# Altium PCB PowerUnit.PcbDoc
Units mil, origin at the board's own origin, x right, y up, seen from the top; angles counter-clockwise.
Board outline 3248.03 x 3149.61 mil, 2 copper layers (Top Layer, Bottom Layer); 31 components, 12 nets, 92 pads, 3 vias.
Unrouted connection lines stored in the file: 1.
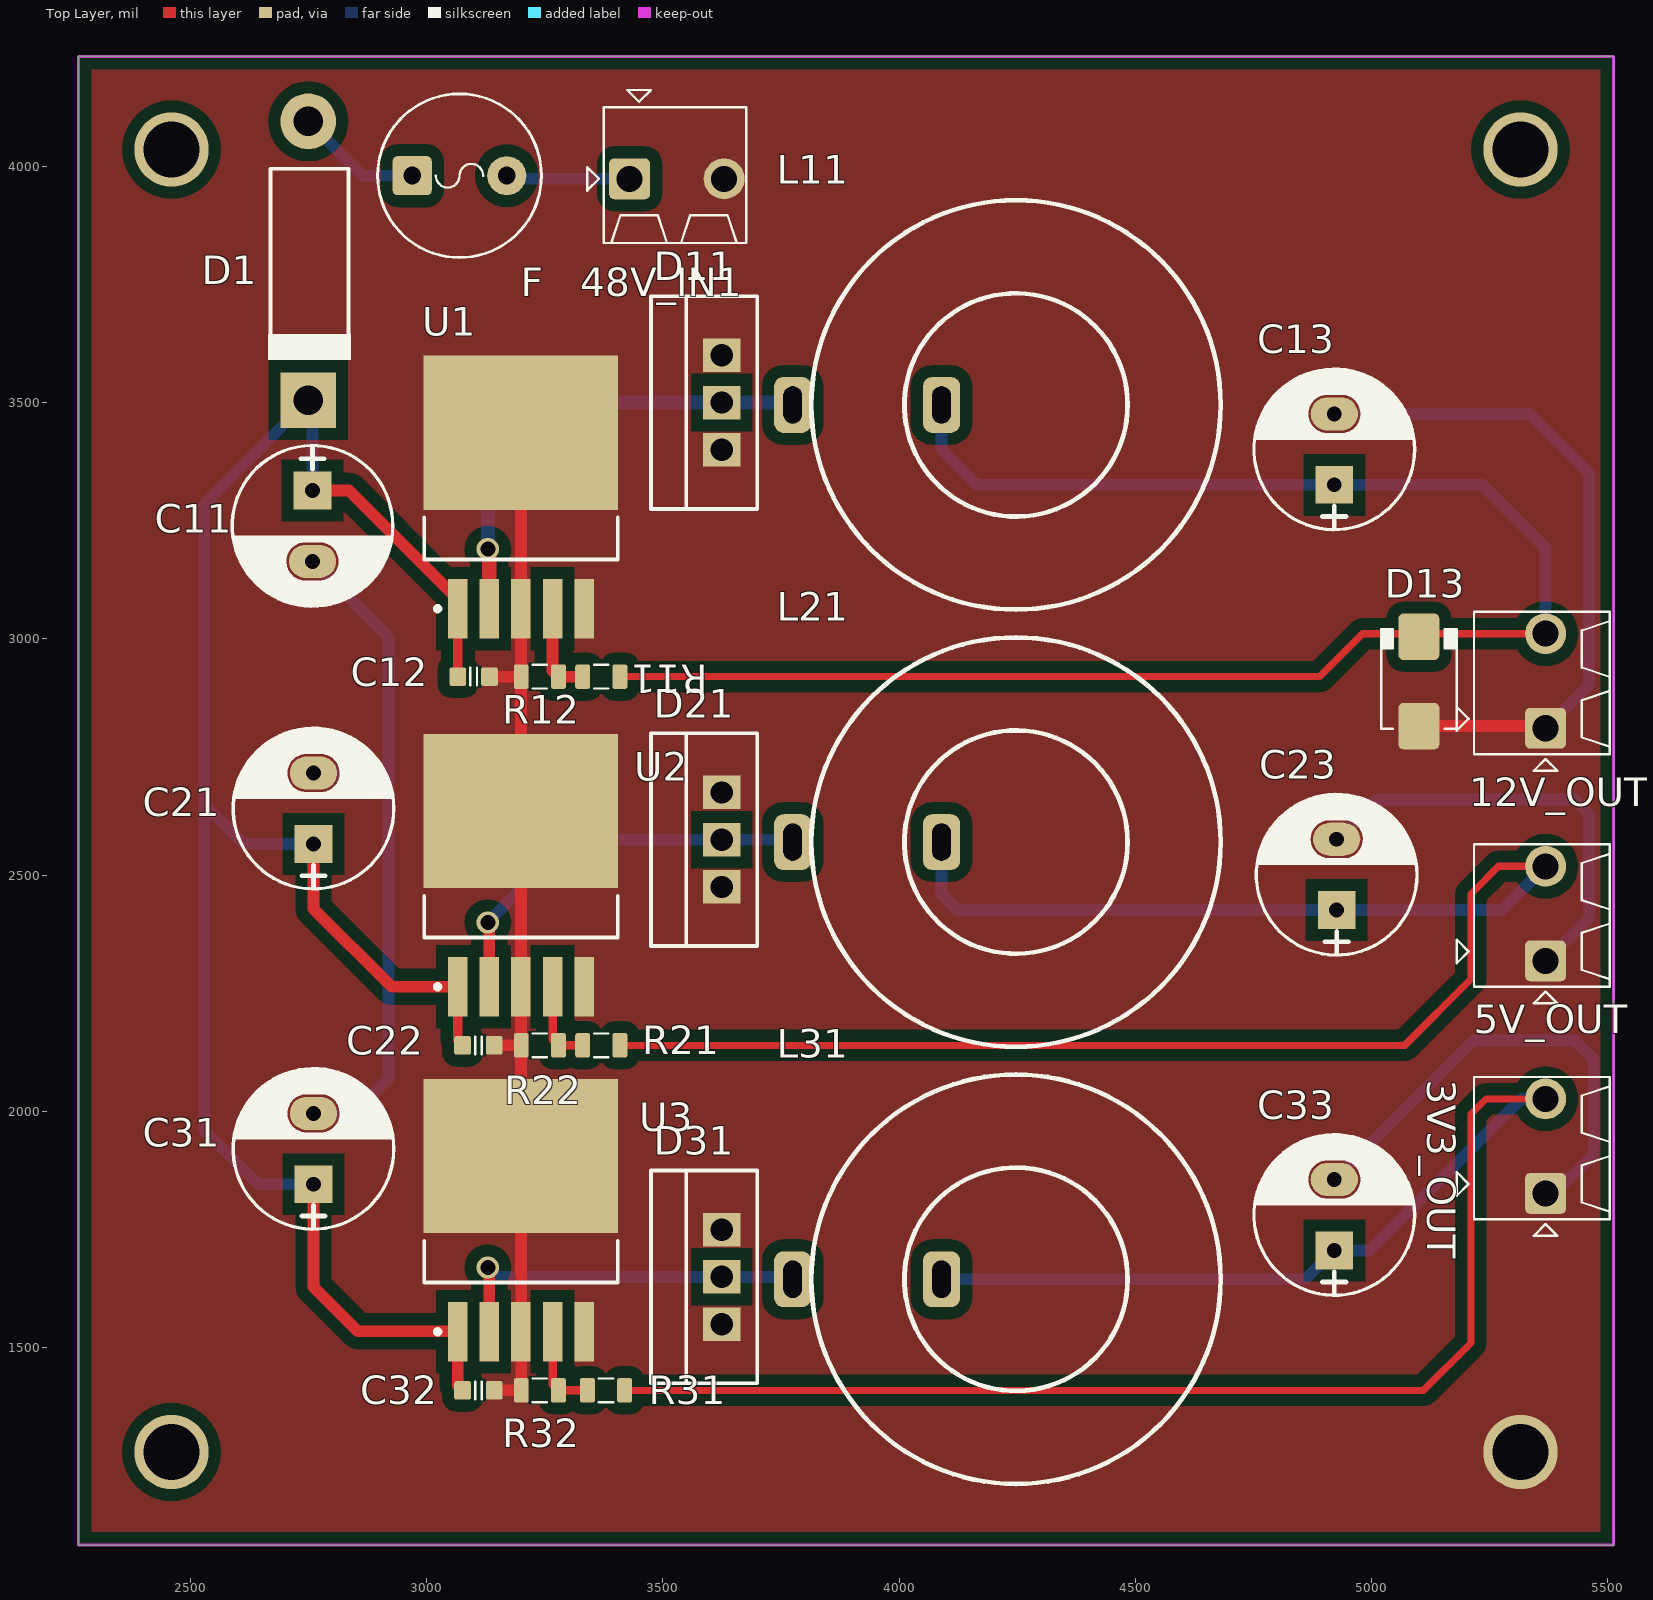
[diagram p0: Top Layer view]
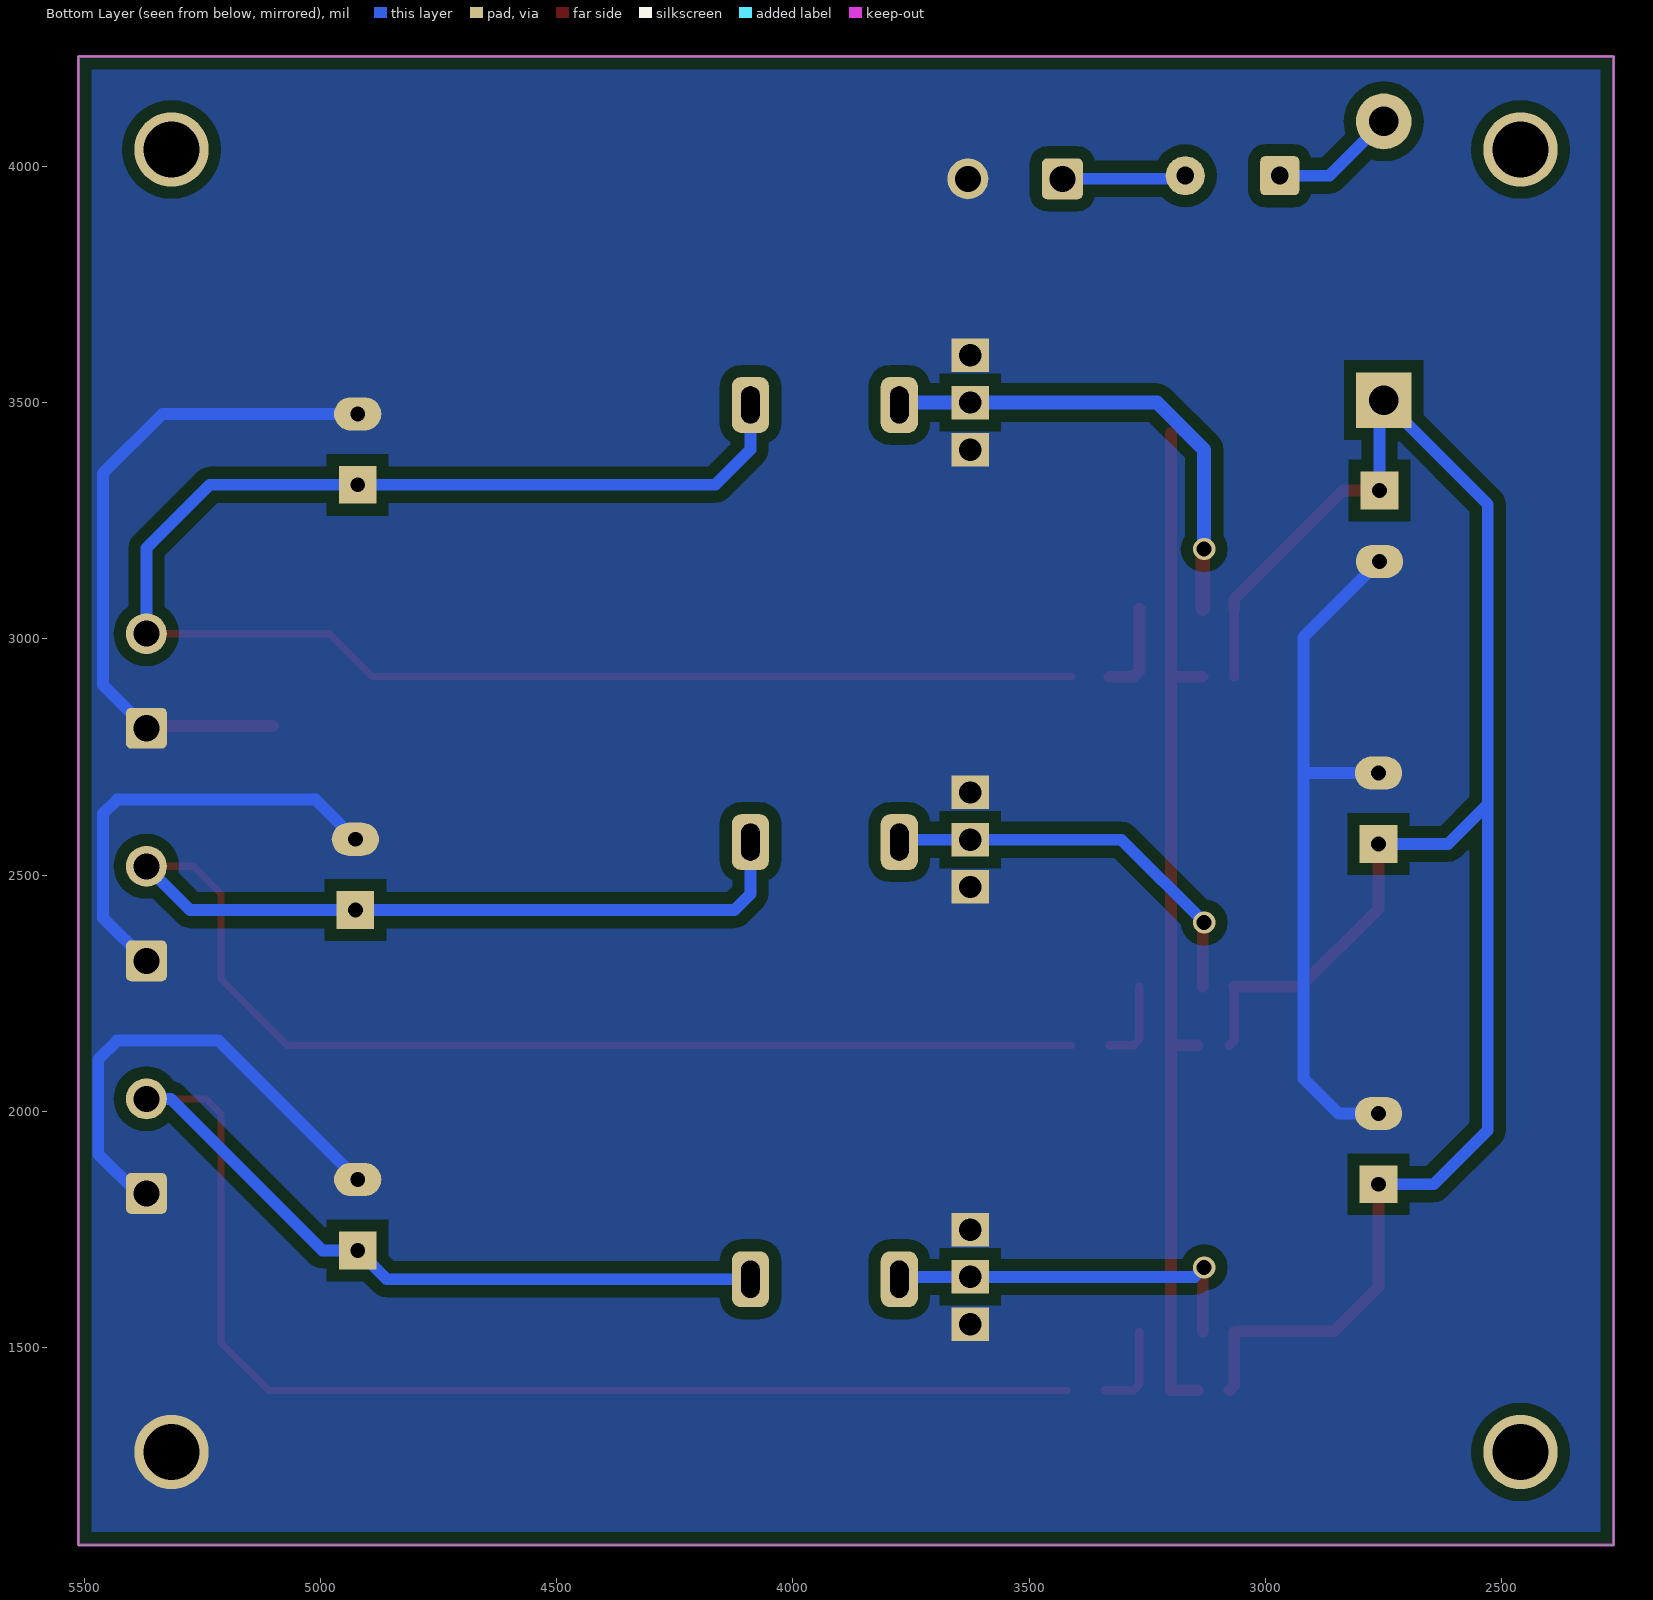
[diagram p1: Bottom Layer view, seen from below]
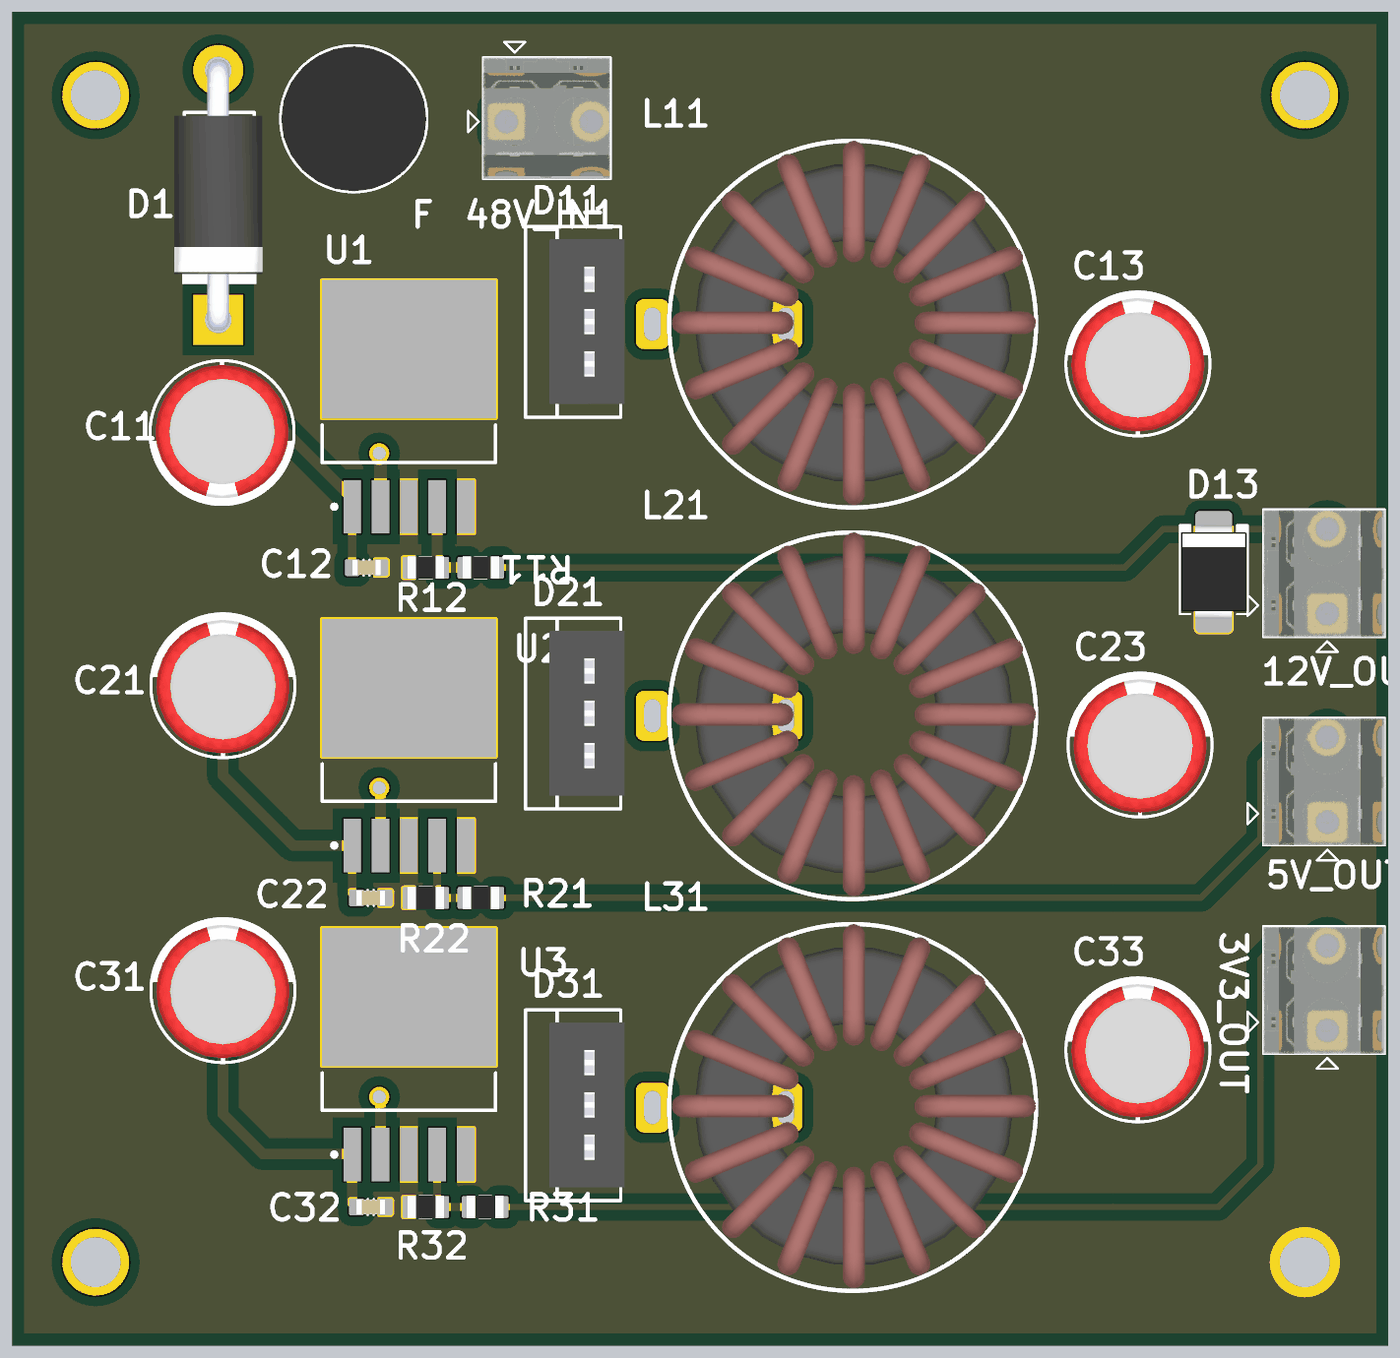
[diagram p2: 3D render of the assembled board from above, using the file's embedded part models]

## Layer stack, top to bottom
Top Solder: solder mask 0.4, Solder Resist, Dk 3.5
Top Layer: signal copper 1.4
Dielectric 1: dielectric 12.6, FR-4, Dk 4.8
Bottom Layer: signal copper 1.4
Bottom Solder: solder mask 0.4, Solder Resist, Dk 3.5

## Board outline
2263.78,1082.68 5511.81,1082.68 5511.81,4232.28 2263.78,4232.28

## Design rules (kind name [scope] priority, off if disabled: settings)
Clearance [All] p1: gap=25
PlaneConnect [All] p1: planeconnectstyle=Direct reliefexpansion=20 reliefentries=4 reliefconductorwidth=10 reliefairgap=10
PolygonConnect [All] p1: connectstyle=Direct reliefconductorwidth=10 reliefentries=4 polygonreliefangle="90 Angle" airgapwidth=10
RoutingVias [All] p1: holewidth=28 width=50 viastyle="Through Hole" minholewidth=19.68 minwidth=43.31 maxholewidth=196.85 maxwidth=196.85
SolderMaskExpansion [All] p1: expansion=4
Width [All] p1: maxlimit=78.74 minlimit=10 preferedwidth=10
29 further rules are at their usual default settings.

## Components (designator, comment, footprint, x,y, rotation, side; value= is the part's Value field where it differs from the comment)
3V3_OUT "Stackable ScrewTerm" 2P_PCB_ScrewTerm_200mil 5216.54,1771.65 r0 top
5V_OUT "Stackable ScrewTerm" 2P_PCB_ScrewTerm_200mil 5216.54,2263.78 r0 top
12V_OUT "Stackable ScrewTerm" 2P_PCB_ScrewTerm_200mil 5216.54,2755.91 r0 top
48V_IN1 "Stackable ScrewTerm" 2P_PCB_ScrewTerm_200mil 3375,4125 r270 top
C11 "Cap" "CAP 3.8mm" 2760,3240 r270 top
C12 "CAP NP" CAPC1608N 3100,2920 r180 top
C13 "Cap" "CAP 3.8mm" 4920,3400 r90 top
C21 "Cap" "CAP 3.8mm" 2760,2640 r90 top
C22 "CAP NP" CAPC1608N 3110,2140 r180 top
C23 "Cap" "CAP 3.8mm" 4925,2500 r90 top
C31 "Cap" "CAP 3.8mm" 2760,1920 r90 top
C32 "CAP NP" CAPC1608N 3110,1410 r180 top
C33 "Cap" "CAP 3.8mm" 4920,1780 r90 top
D1 "SS14" "Diode 3A" 2750,3800 r270 top
D11 "MOSPEC S20C40C" TO-220 3625,3500 r90 top
D13 "TVS12V" DO-214AA 5100,2910 r90 top
D21 "MOSPEC S20C40C" TO-220 3625,2575 r90 top
D31 "MOSPEC S20C40C" TO-220 3625,1650 r90 top
F "1.5A" FUSE_SR-5-BK 3070,3980 r0 top
L11 "Inductor" Toroid 3775,3500 r0 top
L21 "Inductor" Toroid 3775,2575 r0 top
L31 "Inductor" Toroid 3775,1650 r0 top
R11 "Res" RESC2012N 3370,2920 r0 top
R12 "Res" RESC2012N 3240,2920 r0 top
R21 "Res" RESC2012N 3370,2140 r0 top
R22 "Res" RESC2012N 3240,2140 r0 top
R31 "Res" RESC2012N 3380,1410 r0 top
R32 "Res" RESC2012N 3240,1410 r0 top
U1 "LM2596S-ADJ" TS5B_N 3200,3300 r90 top
U2 "LM2596S-ADJ" TS5B_N 3200,2500 r90 top
U3 "LM2596S-ADJ" TS5B_N 3200,1770 r90 top

## Footprints (in the part's own frame and the unit in brackets; to place one, negate y for a bottom-side part, rotate by r counter-clockwise, add the part's x,y. Pads: shape width x height; smd on the part's side, far side on the other; paste and mask are expansions set on the pad)
2P_PCB_ScrewTerm_200mil [mm]
  rrect25% 2.2x2.2 hole 1.4: 1(3.85,1.397)
  round 2.2 hole 1.4: 2(3.85,6.477)
  silkscreen extent -0.93,-0.89 7.3,7.66, body extent 0,0 7.3,7.62, height 8.5
"CAP 3.8mm" [mil] "16V 470uF"
  rect 80x80 hole 31.5: 1(-74,-1)
  oval 70x100 hole 31.5: 2(76,-1)
  silkscreen extent -169,-171 171,169, body extent -159,-158 156,156, height 446
CAPC1608N [mm] "Chip Capacitor, Body 1.6x0.8mm, 0603, IPC Medium Density"
  round 0.254 on Mech14: 0(0,0)
  rrect25% 0.9x1 smd: 1(-0.85,0) 2(0.85,0)
  Top Layer pour cut-out: -0.4,0.6 0.4,0.6 0.4,-0.6 -0.4,-0.6
  silkscreen extent -0.18,-0.48 0.18,0.48, body extent -0.85,-0.45 0.85,0.45, height 0.89
"Diode 3A" [mm] "Diode Schottky 1N5822"
  round 3 hole 1.6: A(-7.493,0)
  rect 3x3 hole 1.6: K(7.493,0)
  silkscreen extent -4.95,-2.16 5.33,2.29, body extent -8.15,-2.65 8.15,2.65, height 6.3
DO-214AA [mm] "JEDEC DO214 variation AA. SMB"
  round 0.508 on Mech14: 0(0,0)
  rrect25% 2.5x2.2 smd: A(-2.4,0) K(2.4,0)
  silkscreen extent -2.54,-2.03 2.79,2.03, body extent -2.8,-1.97 2.8,1.98, height 2.62
FUSE_SR-5-BK [mm]
  round 0.5 on Mech14: 0(0,0)
  rrect25% 2.1x2.1 hole 0.965: 1(-2.54,0)
  round 2.1 hole 0.965: 2(2.54,0)
  silkscreen extent -4.4,-4.4 4.4,4.4, body extent -4.35,-4.32 4.35,4.32, height 8.29
RESC2012N [mm] "Chip Resistor, Body 2.0x1.2mm, 0805, IPC Medium Density"
  round 0.254 on Mech14: 0(0,0)
  rrect25% 0.8x1.3 smd: 1(-1,0) 2(1,0)
  Top Layer pour cut-out: -0.6,0.75 0.6,0.75 0.6,-0.75 -0.6,-0.75
  silkscreen extent -0.38,-0.64 0.38,0.64, body extent -1.1,-0.67 1.1,0.68, height 0.69
TO-220 [mm]
  rect 1.8x2 hole 1.2: 1(-2.54,0) 2(0,0) 3(2.54,0)
  silkscreen extent -5.71,-1.91 5.71,3.81, body extent -4.92,-2.13 4.98,2.37, height 8.08
Toroid [mm]
  rrect50% 2x3 hole 1 slot 2 at 90 deg: 1(0,-0.127) 2(8,-0.127)
  silkscreen extent 1,-11.13 23,10.87, body extent 1.16,-10.97 23,10.87, height 11.43
TS5B_N [mm] "D2-PAK, 6-Leads, Body 8.6x10.2mm, Pitch 1.7mm, Lead Span 14.1mm, IPC Medium Density"
  rect 3.2x1.05 smd: 1(-6,3.4) 2(-6,1.7) 3(-6,0) 4(-6,-1.7) 5(-6,-3.4)
  rect 8.3x10.45 smd: 6(3.45,0)
  silkscreen extent -6.12,-5.2 -1.1,5.2, body extent -3.35,-5.2 6.05,5.2, height 4.65

## Part data
3V3_OUT 5V_OUT 12V_OUT 48V_IN1: library part 2P_ScrewTerm_90S_3.81MM, "Terminal Block Screw Type THT 2-Position 3.81mm pitch"
D1 D13: library part "Diode Schottky"
D11 D21 D31: library part "Diode x2"
F: library part Fuse
U1 U2 U3: "SIMPLE SWITCHER Power Converter 150 KHz 3A Step-Down Voltage Regulator"

## Free pads (board coordinates)
  round 157.48 hole 118.11: 0(2460.63,4035.43) 1(2460.63,1279.53) 2(5314.96,1279.53) 3(5314.96,4035.43)

## Via types
v1: diameter 47.24, hole 31.5, Top Layer to Bottom Layer, 3 vias

## Nets (pads, with @x,y where several pads share a name; then routed paths per layer and width w, separated by ;. In a path a pad name is that pad's centre, name@x,y a point inside that pad or via, vN(x,y) a via of type N, cw(c..) or ccw(c..) an arc to the next point about the centre after c; other vN are vias at no path point)
+5V: 5V_OUT.2 C23.1 L21.2 R21.2 | length 3661.7
  Top Layer w15: R21.2 5070,2140 5210,2280 5210,2460 5268.78,2518.78 5V_OUT.2
  Bottom Layer w25: L21.2 4089.96,2460.04 4124,2426 C23.1 5275.33,2426 5V_OUT.2
+12V: 3V3_OUT.2 12V_OUT.2 C13.1 C33.1 D13.K L11.2 L31.2 R11.2 R31.2 | length 7561.2
  Top Layer w15: R11.2 4890,2920 4980.91,3010.91 12V_OUT.2 ; R31.2 5110,1410 5210,1510 5210,1995 5241.65,2026.65 3V3_OUT.2
  Bottom Layer w25: L31.2 4860,1645 C33.1 4996,1706 5316.65,2026.65 3V3_OUT.2 ; L11.2 4089.96,3400.04 4164,3326 C13.1 5234,3326 5368.11,3191.89 12V_OUT.2
+48V: 48V_IN1.1 F.2 | length 262.7
  Bottom Layer w25: F.2 3176.57,3973.43 48V_IN1.1
FB1: R11.1 R12.2 U1.4 | length 200.2
  Top Layer w25: U1.4 3266.93,2932.44 R12.2 R11.1
FB2: R21.1 R22.2 U2.4 | length 180.2
  Top Layer w18: U2.4 3266.93,2152.44 R22.2 R21.1
FB3: R31.1 R32.2 U3.4 | length 190.2
  Top Layer w18: U3.4 3266.93,1422.44 R32.2 R31.1
GND: 3V3_OUT.1 5V_OUT.1 12V_OUT.1 48V_IN1.2 C11.2 C12.1 C13.2 C21.2 C22.1 C23.2 C31.2 C32.1 C33.2 D11.1 D11.3 D13.A D21.1 D21.3 D31.1 D31.3 pad.2 R12.1 R22.1 R32.1 U1.3 U1.5 U1.6 U2.3 U2.5 U2.6 U3.3 U3.5 U3.6 | length 7112.4
  Top Layer w25: C12.1 R12.1@3200,2920 ; C32.1 R32.1 3200.63,1659.37 3200,1660 U3.6 R22.1@3200,2140 ; C22.1 R22.1@3200,2140 ; U1.6 U1.3 R12.1@3200,2920 ; R22.1 R22.1@3200,2140 ; R12.1 R12.1@3200,2920 ; D13.A 5363.5,2815.51 12V_OUT.1 ; R22.1@3200,2140 U2.3 U2.6 R12.1@3200,2920
  Bottom Layer w25: C11.2 2920,3003 2920,2710 ; C31.2 2846,1996 2920,2070 2920,2710 ; C21.2 2914,2716 2920,2710 ; C33.2 5215,2150 5430,2150 5470,2110 5470,1910 5386.65,1826.65 3V3_OUT.1 ; C13.2 5334,3476 5460,3350 5460,2902.8 12V_OUT.1 ; C23.2 5010,2660 5430,2660 5460,2630 5460,2410 5368.78,2318.78 5V_OUT.1
NetD1_1: D1.A F.1 | length 267.6
  Bottom Layer w25: D1.A 2865,3980 F.1
SW1: D11.2 L11.1 U1.2 | length 1026
  Top Layer w30: v1(3130,3190) 3133.07,3186.93 U1.2
  Bottom Layer w30: v1(3130,3190) 3130,3400 3230,3500 D11.2 3770,3500 L11.1
SW2: D21.2 L21.1 U2.2 | length 857.1
  Top Layer w25: v1(3130,2400) 3133.07,2396.93 U2.2
  Bottom Layer w25: v1(3130,2400) 3305,2575 D21.2 3770,2575 L21.1
SW3: D31.2 L31.1 U3.2 | length 792.8
  Top Layer w25: v1(3130,1670) 3133.07,1666.93 U3.2
  Bottom Layer w25: v1(3130,1670) 3150,1650 D31.2 3770,1650 L31.1
VIN: C11.1 C12.2 C21.1 C22.2 C31.1 C32.2 D1.K U1.1 U2.1 U3.1 | length 4260.8
  Top Layer w20: U3.1@3056.54,1533.78 U3.1@3056.54,1534.96 ; U2.1 3066.14,2150.39 C22.2 ; U1.1 3066.54,3063.39 C12.2
  Top Layer w25: C11.1 2836,3314 3066.14,3083.86 U1.1 ; C31.1 2761,1629 2855.04,1534.96 U3.1@3056.54,1534.96 ; C21.1 2761,2429 2926.22,2263.78 U2.1 ; U3.1 3066.14,1420.39 C32.2
  Bottom Layer w25: C11.1 2759,3496 D1.K 2530,3285 2530,2650 ; C31.1 2644,1846 2530,1960 2530,2650 ; C21.1 2614,2566 2530,2650
pads on no net: C12.0 C22.0 C32.0 D13.0 F.0 R11.0 R12.0 R21.0 R22.0 R31.0 R32.0

## Polygon pours and split planes (outlines as drawn)
GND on Bottom Layer "GND_L02_P000" (solid, remove dead copper, pour order 0): 2263.78,1082.68 5511.81,1082.68 5511.81,4232.28 2263.78,4232.28
GND on Top Layer "GND_L01_P004" (solid, remove dead copper, pour order 4): 2263.78,1082.68 5511.81,1082.68 5511.81,4232.28 2263.78,4232.28

## Keep-outs
Keep-Out Layer:
  the board outline again, w5.91